# Altium PCB 转接板.PcbDoc
Units mm, origin at the board's own origin, x right, y up, seen from the top; angles counter-clockwise.
Board outline 28 x 16.02 mm, 2 copper layers (Top Layer, Bottom Layer); 2 components, 7 nets, 12 pads, 0 vias.
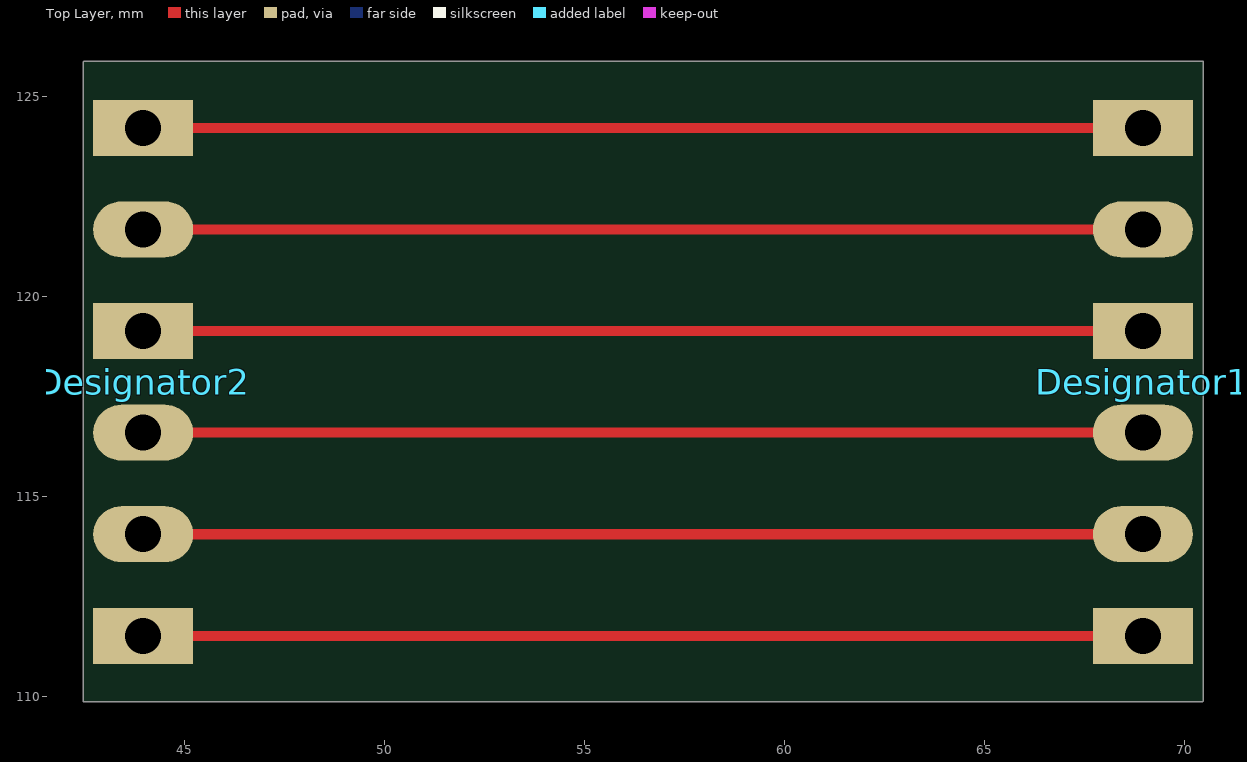
[diagram p0: Top Layer view]
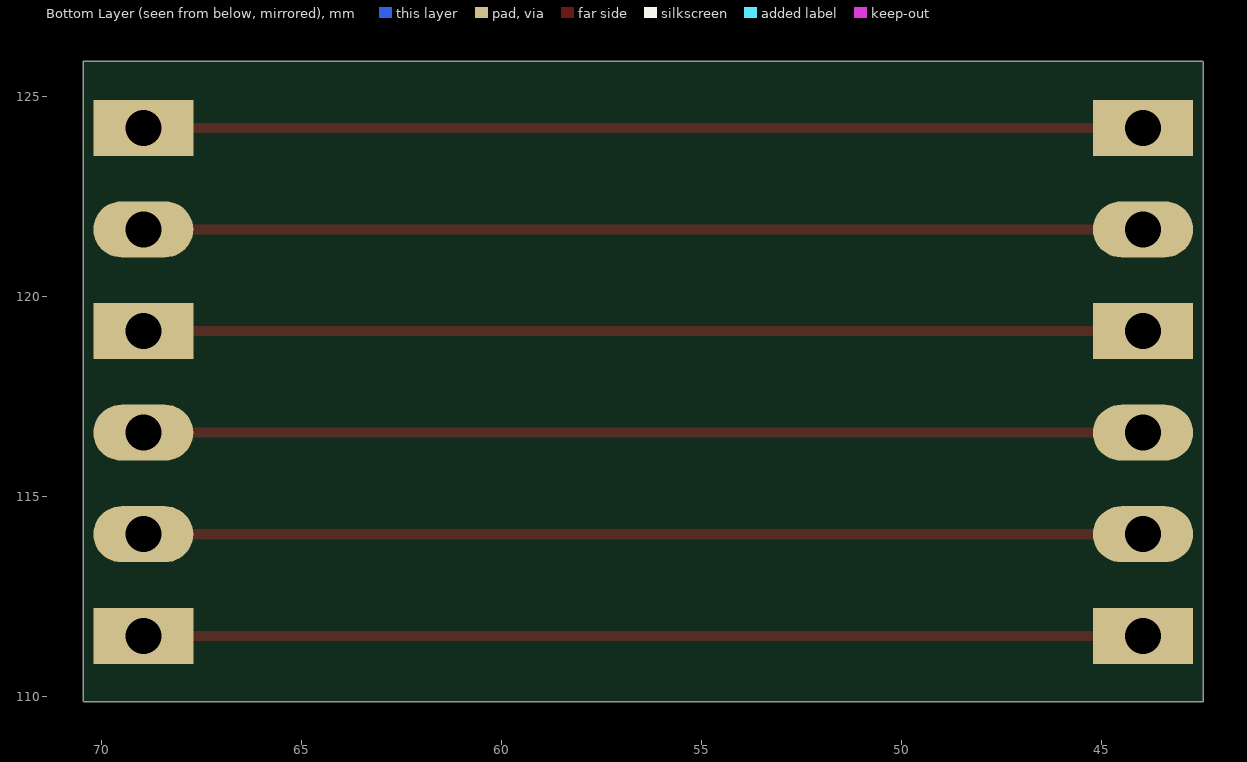
[diagram p1: Bottom Layer view, seen from below]

## Layer stack, top to bottom
Top Solder: solder mask 0.0102, Solder Resist, Dk 3.5
Top Layer: signal copper 0.0356
Dielectric 1: dielectric 0.32, FR-4, Dk 4.8
Bottom Layer: signal copper 0.0356
Bottom Solder: solder mask 0.0102, Solder Resist, Dk 3.5

## Board outline
42.466,109.855 70.447,109.855 70.466,109.874 70.466,125.874 42.485,125.874 42.466,125.855

## Design rules (kind name [scope] priority, off if disabled: settings)
Clearance [All] p1: gap=0.254 ignorepadtopadclearanceinfootprint=FALSE except(0: Arc-Hole Track-Hole SMDPad-Hole THPad-Hole Via-Hole Fill-Hole Poly-Hole Region-Hole Text-Hole)
PolygonConnect [All] p1: connectstyle=Relief reliefconductorwidth=0.254 reliefentries=4 polygonreliefangle="90 Angle" airgapwidth=0.254
RoutingVias [All] p1: holewidth=0.711 width=1.27 viastyle="Through Hole" minholewidth=0.711 minwidth=1.27 maxholewidth=0.711 maxwidth=1.27
SolderMaskExpansion [All] p1: expansion=0.102 istentingtop=FALSE
Width [All] p1: maxlimit=0.254 minlimit=0.254 preferedwidth=0.254
30 further rules are at their usual default settings.

## Components (designator, comment, footprint, x,y, rotation, side; value= is the part's Value field where it differs from the comment)
Designator1 "MH-CD42" MH-CD42 68.961,121.666 r0 top
Designator2 "MH-CD42" MH-CD42 43.969,121.666 r0 top

## Footprints (in the part's own frame and the unit in brackets; to place one, negate y for a bottom-side part, rotate by r counter-clockwise, add the part's x,y. Pads: shape width x height; smd on the part's side, far side on the other; paste and mask are expansions set on the pad)
MH-CD42 [mm]
  rect 2.5x1.4 hole 0.9: 1(0,2.54) 3(0,-2.54) 6(0,-10.16)
  oval 2.5x1.4 hole 0.9: 2(0,0) 4(0,-5.08) 5(0,-7.62)

## Nets (pads, with @x,y where several pads share a name; then routed paths per layer and width w, separated by ;. In a path a pad name is that pad's centre, name@x,y a point inside that pad or via, vN(x,y) a via of type N, cw(c..) or ccw(c..) an arc to the next point about the centre after c; other vN are vias at no path point)
a: Designator1.1 Designator2.1 | length 25
  Top Layer w0.254: Designator2.1 Designator1.1
b: Designator1.2 Designator2.2 | length 25
  Top Layer w0.254: Designator2.2 Designator1.2
c: Designator1.3 Designator2.3 | length 25
  Top Layer w0.254: Designator2.3 Designator1.3
d: Designator1.4 Designator2.4 | length 25
  Top Layer w0.254: Designator2.4 Designator1.4
e: Designator1.5 Designator2.5 | length 25
  Top Layer w0.254: Designator2.5 Designator1.5
f: Designator1.6 Designator2.6 | length 25
  Top Layer w0.254: Designator2.6 Designator1.6
NewNet: 

## Silkscreen, mask and mechanical layers (free items; w line width, h text height)
Mechanical 1:
  lines w0.256: 42.466,125.855 42.466,109.855 70.447,109.855 ; 42.485,125.874 70.466,125.874 70.466,109.874